# Altium PCB XIAO-HAT-3.PcbDoc
Units mm, origin at the board's own origin, x right, y up, seen from the top; angles counter-clockwise.
Board outline 17.78 x 20.96 mm, 2 copper layers (Top Layer, Bottom Layer); 17 components, 19 nets, 71 pads, 11 vias.
Unrouted connection lines stored in the file: 9.
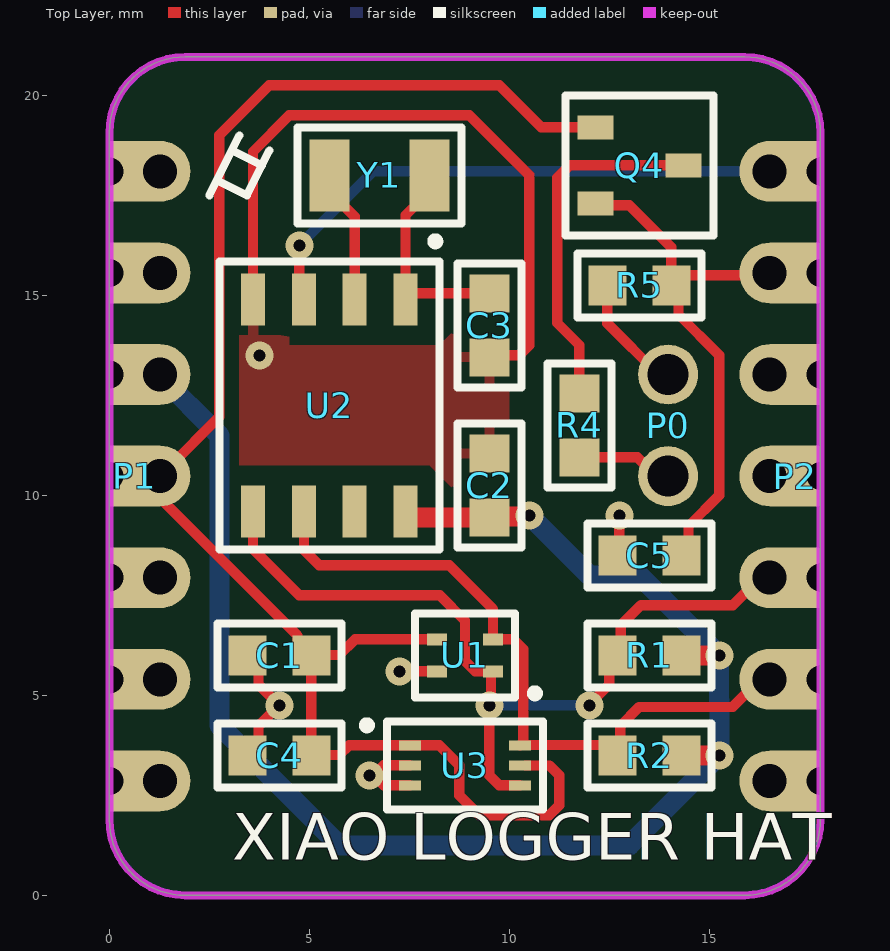
[diagram p0: Top Layer view]
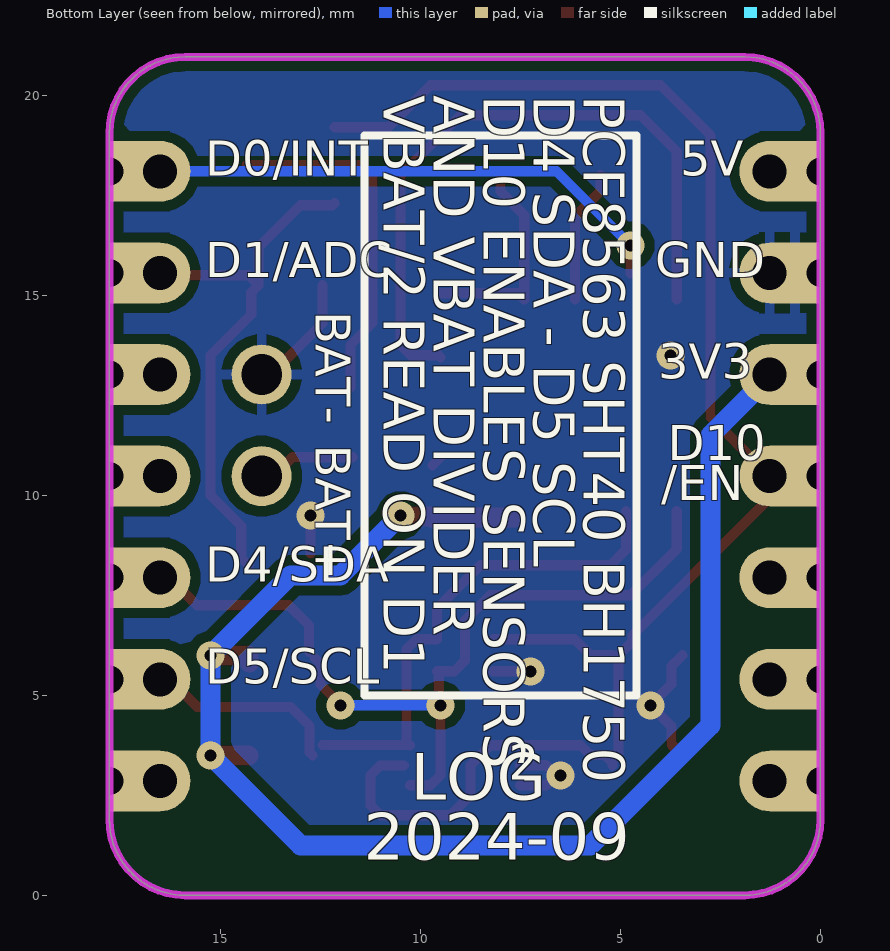
[diagram p1: Bottom Layer view, seen from below]

## Layer stack, top to bottom
Top Solder: solder mask 0.0102, Solder Resist, Dk 3.5
Top Layer: signal copper 0.0356
Dielectric 1: dielectric 0.32, FR-4, Dk 4.8
Bottom Layer: signal copper 0.0356
Bottom Solder: solder mask 0.0102, Solder Resist, Dk 3.5

## Board outline
0,1.9 ccw(c1.9,1.9) 1.9,0 15.88,0 ccw(c15.88,1.9) 17.78,1.9 17.78,19.06 ccw(c15.88,19.06) 15.88,20.96 1.9,20.96 ccw(c1.9,19.06) 0,19.06

## Design rules (kind name [scope] priority, off if disabled: settings)
Clearance [All] p1: gap=0.254 ignorepadtopadclearanceinfootprint=FALSE except(0: Arc-Hole Track-Hole SMDPad-Hole THPad-Hole Via-Hole Fill-Hole Poly-Hole Region-Hole Text-Hole; 0.2: Arc-SMDPad Track-SMDPad SMDPad-SMDPad)
MinimumSolderMaskSliver [All] p1: minsoldermaskwidth=0.15
PolygonConnect PolygonConnect_Via [All vs IsVia] p1: connectstyle=Direct reliefconductorwidth=0.254 reliefentries=4 polygonreliefangle="90 Angle" airgapwidth=0.254
PolygonConnect [All] p2: connectstyle=Relief reliefconductorwidth=0.254 reliefentries=4 polygonreliefangle="90 Angle" airgapwidth=0.254
RoomDefinition XIAO-HAT-3 [InComponentClass('XIAO-HAT-3')] p1: confinementstyle=ConfineIn formatcopy=TRUE lockcomponents=FALSE outline -106.68,-83.185 -55.88,-83.185 -55.88,-57.785 -106.68,-57.785
RoutingVias [All] p1: holewidth=0.711 width=1.27 viastyle="Through Hole" minholewidth=0.711 minwidth=1.27 maxholewidth=0.711 maxwidth=1.27
SilkToSilkClearance [All] p1: silktosilkclearance=0.2
SilkToSolderMaskClearance [IsPad] p1: minsilkscreentomaskgap=0.1 clearancetoexposedcopper=TRUE
SolderMaskExpansion [All] p1: expansion=0.102 istentingtop=FALSE
Width [All] p1: maxlimit=2 minlimit=0.2 preferedwidth=0.254 minimp=50.000000 maximp=50.000000 favimp=50.000000
27 further rules are at their usual default settings.

## Components (designator, comment, footprint, x,y, rotation, side; value= is the part's Value field where it differs from the comment)
C1 "Capacitor" XIAO-HAT_0603C-BOX 4.25,6 r180 top value=100n
C2 "Capacitor" XIAO-HAT_0603C-BOX 9.5,10.25 r90 top value=100n
C3 "Capacitor" XIAO-HAT_0603C-BOX 9.5,14.25 r270 top value=22p
C4 "Capacitor" XIAO-HAT_0603C-BOX 4.25,3.5 r180 top value=100n
C5 "Capacitor" XIAO-HAT_0603C-BOX 13.5,8.5 r180 top value=100n
P0 "BAT" 2P-2.54mm-NOSILK 13.97,11.75 r90 top locked value="2.54mm 1x2P"
P1 "7P2.54MM" 7P-2.54mm-XIAO 1.27,10.48 r270 top locked value="2.54mm 1x7P"
P2 "7P2.54MM" 7P-2.54mm-XIAO 16.51,10.48 r90 top locked value="2.54mm 1x7P"
Q4 "3400" XIAO-HAT_SOT23-3 13.25,18.25 r270 top value=N-FET
R1 "Resistor" XIAO-HAT_0603R-BOX 13.5,6 r0 top value=10K
R2 "Resistor" XIAO-HAT_0603R-BOX 13.5,3.5 r0 top value=10K
R4 "Resistor" XIAO-HAT_0603R-BOX 11.75,11.75 r270 top value=100K
R5 "Resistor" XIAO-HAT_0603R-BOX 13.25,15.25 r0 top value=100K
U1 "SHT40" XIAO-HAT_SHT40 8.89,6 r180 top locked value=I2C
U2 "PCF8563" XIAO-HAT_SOP-8 5.5,12.25 r270 top value=I2C
U3 "BH1750FVI" XIAO-HAT_BH1750 8.89,3.25 r0 top locked value=I2C
Y1 "Oscillator" XIAO-HAT_FC135 6.75,18 r0 top value="32.768kHz 12.5pF"

## Footprints (in the part's own frame and the unit in brackets; to place one, negate y for a bottom-side part, rotate by r counter-clockwise, add the part's x,y. Pads: shape width x height; smd on the part's side, far side on the other; paste and mask are expansions set on the pad)
2P-2.54mm-NOSILK [mm] "2-pin 2.54mm thru hole general footprint"
  round 1.5 hole 1.02 mask+0.05: 1(-1.27,0) 2(1.27,0)
7P-2.54mm-XIAO [mm] "7-pin 2.54mm thru hole general footprint"
  rect 1.52x1.27 hole 0.7 copper offset 0,0.64 mask+0.05: 1(-7.62,-1.27) 2(-5.08,-1.27) 3(-2.54,-1.27) 4(0,-1.27) 5(2.54,-1.27) 6(5.08,-1.27) 7(7.62,-1.27)
  round 1.52 hole 0.85 mask+0.05: 1(-7.62,0) 2(-5.08,0) 3(-2.54,0) 4(0,0) 5(2.54,0) 6(5.08,0) 7(7.62,0)
XIAO-HAT_0603C-BOX [mm] "0603 capacitor footprint for XIAO-HAT design"
  rect 0.95x1 smd mask+0.05: 1(-0.8,0) 2(0.8,0)
  silkscreen extent -1.55,-0.8 1.55,0.8, body extent -0.85,-0.45 0.85,0.45, height 0.9
XIAO-HAT_0603R-BOX [mm] "0603 resistor footprint for XIAO-HAT design"
  rect 0.95x1 smd mask+0.05: 1(-0.8,0) 2(0.8,0)
  silkscreen extent -1.55,-0.8 1.55,0.8, body extent -0.85,-0.45 0.85,0.45, height 0.55
XIAO-HAT_BH1750 [mm] "BH1750 footprint for XIAO-HAT design"
  rect 0.55x0.25 smd mask+0.05: 1(-1.375,0.5) 2(-1.375,0) 3(-1.375,-0.5) 4(1.375,-0.5) 5(1.375,0) 6(1.375,0.5)
  silkscreen extent -2.55,-1.1 1.95,1.1, body extent -1.5,-0.8 1.5,0.8, height 0.75
XIAO-HAT_FC135 [mm] "1206 oscillator footprint for XIAO-HAT deisgn"
  rect 1x1.8 smd mask+0.05: 1(-1.25,0) 2(1.25,0)
  silkscreen extent -2.05,-1.2 2.05,1.2, body extent -1.6,-0.75 1.6,0.75, height 0.9
XIAO-HAT_SHT40 [mm] "SHT40 footprint for the XIAO-HAT design"
  rect 0.5x0.3 smd mask+0.05: 1(-0.7,0.4) 2(-0.7,-0.4) 3(0.7,-0.4) 4(0.7,0.4)
  silkscreen extent -1.85,-1.05 1.25,1.05, body extent -0.75,-0.75 0.75,0.75, height 0.56
XIAO-HAT_SOP-8 [mm] "SOP-8 footprint for XIAO-HAT design"
  rect 1.3x0.6 smd mask+0.05: 1(-2.65,1.905) 2(-2.65,0.635) 3(-2.65,-0.635) 4(-2.65,-1.905) 5(2.65,-1.905) 6(2.65,-0.635) 7(2.65,0.635) 8(2.65,1.905)
  silkscreen extent -4.2,-2.75 3.6,2.75, body extent -3,-2.45 3,2.45, height 1.75
XIAO-HAT_SOT23-3 [mm] "SOT23-3 footprint for XIAO-HAT design"
  rect 0.6x0.9 smd mask+0.05: 1(-0.95,-1.1) 2(0.95,-1.1) 3(0,1.1)
  silkscreen extent -1.75,-1.85 1.75,1.85, body extent -1.45,-1.2 1.45,1.2, height 1.1

## Part data
C1 C2 C4 C5: "Capacitor 100nF ±10% 50V", Manufacturer=Samsung, Package=0603, Component=CL10B104KB8NNNC, Function=Decoupling
C3: "Capacitor 22pF ±5% 50V", Manufacturer=Samsung, Package=0603, Component=CL10C220JB8NNNC, Function="XO Cap"
P0: library part "2-pins Header", "General 2-pin connection", Component=none, Function="BAT CON"
P1 P2: library part "7-pins Header", "General 7-pin connection", Component=none, Function="XIAO CON"
Q4: library part MOSFET-N, "MOSFET N-channel 30V 5.7A", Manufacturer=UMW(友台半导体), Package=SOT23-3, Component=AO3400A, Function="VBAT-ADC EN"
R1 R2: "Resistor 10kΩ ±1% 1/16W", Manufacturer=UNI-ROYAL(厚声), Package=0603, Component=0603WAF1002T5E
  R1: Function="SDA pull-up"
  R2: Function="SCL pull-up"
R4 R5: "Resistor 100kΩ ±1% 100mW", Manufacturer=UNI-ROYAL(厚声), Package=0603, Component=0603WAF1003T5E, Function="VBAT DIV"
U1: "SHT40 temperature and humidity sensor", Manufacturer=Sensirion(瑞士盛思锐), Package=DFN_1.5x1.5MM, Component=SHT40-AD1B-R2, Function="T&H sensor"
U2: library part RTC-8563, "IC real-time clock with alarm interrupt", Manufacturer=NXP, Package=SOIC8_150MIL, Component=PCF8563T/5,518, Function=RTC
U3: library part BH1750, "Digital light sensor", Manufacturer=ROHM, Package=WSOF6_1.6X1.6MM, Component=BH1750FVI-TR, Function="light sensor"
Y1: library part XO-2, "Crystal oscillator 32.768kHz 20ppm 12.5pF", Manufacturer=TKD, Package=SMD3215_2P, Component=SF32K32768D31T-12.5, Function="RTC XO"

## Via types
v1: diameter 0.7, hole 0.3, Top Layer to Bottom Layer, tented both sides, 11 vias

## Nets (pads, with @x,y where several pads share a name; then routed paths per layer and width w, separated by ;. In a path a pad name is that pad's centre, name@x,y a point inside that pad or via, vN(x,y) a via of type N, cw(c..) or ccw(c..) an arc to the next point about the centre after c; other vN are vias at no path point)
3V3: C2.1 P1.3 R1.2 R2.2 U2.8 | length 39.1
  Top Layer w0.5: U2.8@7.655,9.45 9.75,9.45 9.75,9.475 10.475,9.475 v1(10.5,9.5) ; R1.2@14.275,5.825 R1.2@14.45,6 ; R2.2 v1(15.25,3.5) ; R1.2 R1.2@14.45,6 ; v1(15.25,6) R1.2@14.45,6
  Bottom Layer w0.5: 0,13.02 1.23,13.02 2.75,11.5 2.75,4.25 5.75,1.25 13,1.25 v1(15.25,3.5) 15.25,4.872 15.246,4.876 15.246,5.908 15.25,5.912 v1(15.25,6) 13.25,8 12,8 v1(10.5,9.5) v1@10.554,9.5
BAT+: P0.1 R4.2 | length 2.5
  Top Layer w0.254: R4.2@11.7,10.95 R4.2 13.198,10.95 13.668,10.48 P0.1
CLK: U2.7
D0/A0: P2.7 U2.3 | length 13.2
  Top Layer w0.254: 4.75,15.552 v1(4.75,16.25)
  Bottom Layer w0.254: v1(4.75,16.25) 6.6,18.1 P2.7@16.51,18.1
D1/A1: C5.1 P2.6 Q4.2 R5.2 | length 13.8
  Top Layer w0.254: Q4.2 12.2,17.25 13,17.25 14.05,16.2 R5.2 ; C5.1@14.3,8.25 14.482,8.432 14.482,9.232 15.25,10 15.25,13.5 14.232,14.518 14.232,15.068 R5.2 ; P2.6@16.51,15.56 16.45,15.5 14.3,15.5 R5.2
D2/A2: P2.5
D3/A3: P2.4
D4/SDA: P2.3 R1.1 U1.1 U2.5 U3.4 | length 21.1
  Top Layer w0.254: U2.5 3.595,8.655 4.75,7.5 8.26,7.5 8.89,6.87 8.89,6.207 8.89,5.86 9.15,5.6 U1.1 9.568,5.6 9.545,5.577 9.545,4.795 v1(9.5,4.75) 9.5,3 9.75,2.75 U3.4 ; v1(12,4.75) 12,4.77 12.498,5.268 12.498,5.787 R1.1@12.631,5.919 ; R1.1@12.788,6.088 12.788,6.748 13.29,7.25 15.586,7.25 16.276,7.94 P2.3@16.51,7.94
  Bottom Layer w0.254: v1(9.5,4.75) v1(12,4.75)
D5/SCL: P2.2 R2.1 U1.2 U2.6 U3.6 | length 17.3
  Top Layer w0.254: U2.6 4.865,8.635 5.25,8.25 8.5,8.25 9.59,7.16 U1.2 10.1,6.4 10.35,6.15 U3.6@10.35,3.756 ; U3.6 10.271,3.756 U3.6@10.35,3.756 ; R2.1@12.444,3.756 U3.6@10.35,3.756 ; R2.1 12.772,3.572 12.772,4.232 13.25,4.71 15.586,4.71 P2.2@16.276,5.4
  Bottom Layer w0.254: P2.2@16.51,5.345 P2.2@16.51,5.4
D6/TX: P2.1
D7/RX: P1.7
D8/SCK: P1.6
D9/MISO: P1.5
D10/MOSI: C1.1 C4.1 P1.4 Q4.1 U1.3 U3.1 U3.5 | length 40.7
  Top Layer w0.254: P1.4@0.85,10.35 4.702,6.498 4.702,6.348 C1.1 C4.1 ; P1.4@1.27,10.48 P1.4@1.512,10.238 ; P1.4@1.48,10.69 2.75,11.96 2.75,19 4,20.25 9.75,20.25 10.8,19.2 Q4.1 ; C4.1@5.2,3.25 C4.1@5.2,3.5 ; C4.1@5.2,3.309 5.398,3.507 5.757,3.507 6,3.75 U3.1 8.25,3.75 8.75,3.25 8.75,2.5 9.25,2 11,2 11.25,2.25 11.25,3 11.002,3.248 U3.5@10.413,3.248 ; C1.1@5.2,6 5.207,6.007 5.757,6.007 6.15,6.4 U1.3
GND: C1.2 C2.2 C3.2 C4.2 C5.2 P0.2 P1.2 R5.1 U1.4 U2.4 U3.2 U3.3 | length 27.5
  Top Layer w0.254: C4.2 3.728,3.778 3.728,4.228 v1(4.25,4.75) 3.728,5.272 3.728,5.722 C1.2 ; U2.4 3.595,18.595 4.5,19.5 9,19.5 10.5,18 10.5,13.75 10.25,13.5 9.55,13.5 C3.2 ; v1(7.25,5.6) U1.4 ; U3.3 6.859,2.75 v1@6.609,3 ; U3.2 6.859,3.25 v1@6.609,3 ; C2.2@9.5,10.95 C2.2@9.7,10.75 ; R5.1 12.45,14.3 13.73,13.02 P0.2 ; C5.2@12.75,8.55 v1(12.75,9.5) ; v1@6.609,3 v1(6.5,3) v1@6.609,3
  other v1: 3.75,13.5
NetC3_1: C3.1 U2.1 Y1.2 | length 5.5
  Top Layer w0.254: Y1.2 8,17.6 7.405,17.005 U2.1 7.555,15.05 C3.1
NetQ4_3: Q4.3 R4.1 | length 8.7
  Top Layer w0.254: R4.1@11.75,12.7 11.75,13.758 11.2,14.308 11.2,17.942 11.508,18.25 Q4.3
NetU2_2: U2.2 Y1.1 | length 3.4
  Top Layer w0.254: Y1.1 5.5,17.6 6.135,16.965 U2.2
VUSB: P1.1

## Polygon pours and split planes (outlines as drawn)
GND on Top Layer "GND_L01_P000" (solid, remove dead copper, pour order 0): 10,14.25 10,10 8.75,10 8,10.75 3.25,10.75 3.25,16 4.5,16 4.5,13.75 8.25,13.75 8.75,14.25
GND on Bottom Layer "GND_L02_P002" (solid, remove dead copper, pour order 2): 0,0 17.78,0 17.78,20.96 0,20.96

## Keep-outs
Keep-Out Layer:
  the board outline again, w0.2

## Silkscreen, mask and mechanical layers (free items; w line width, h text height)
Top Overlay:
  lines w0.2: 2.5,17.5 2.688,17.875 ; 3.25,19 3.063,18.625 ; 4,18.625 3.813,18.25 ; 2.688,17.875 3.438,17.5 3.813,18.25 ; 2.688,17.875 3.063,18.625 ; 3.063,18.625 3.813,18.25
  text "XIAO LOGGER HAT" at 3.076,0.5 h2
Bottom Overlay:
  lines w0.2: 4.6,5 4.6,19 11.4,19 11.4,5 4.6,5
  text "D10 ENABLES SENSORS" at 8.75,20.003 h1.75 r90
  text "PCF8563 SHT40 BH1750" at 6.25,20 h1.75 r90
  text "D4 SDA - D5 SCL" at 7.5,20 h1.75 r90
  text "AND VBAT DIVIDER" at 10,20 h1.75 r90
  text "VBAT/2 READ ON D1" at 11.25,20 h1.75 r90
  text "5V" at 3.503,17.705 h1.5
  text "D0/INT" at 15.38,17.705 h1.5
  text "GND" at 4.135,15.165 h1.5
  text "D1/ADC" at 15.38,15.165 h1.5
  text "BAT-" at 12.9,14.603 h1.5 r90
  text "3V3" at 4.056,12.625 h1.5
  text "BAT+" at 12.9,11.262 h1.5 r90
  text "D10" at 3.819,10.585 h1.5
  text "/EN" at 3.977,9.585 h1.5
  text "D4/SDA" at 15.38,7.545 h1.5
  text "D5/SCL" at 15.38,5.005 h1.5
  text "2" at 7.796,2.605 h1.5
  text "LOG" at 10.245,2 h2
  text "2024-09" at 11.416,0.5 h2